# Altium PCB TECLADO-G5-5A.pcbDoc.PcbDoc (part 2 of 4)
Units mil, origin at the board's own origin, x right, y up, seen from the top; angles counter-clockwise.
Board outline 3514 x 3456 mil, 2 copper layers (Top Layer, Bottom Layer); 59 components, 33 nets, 154 pads, 25 vias.
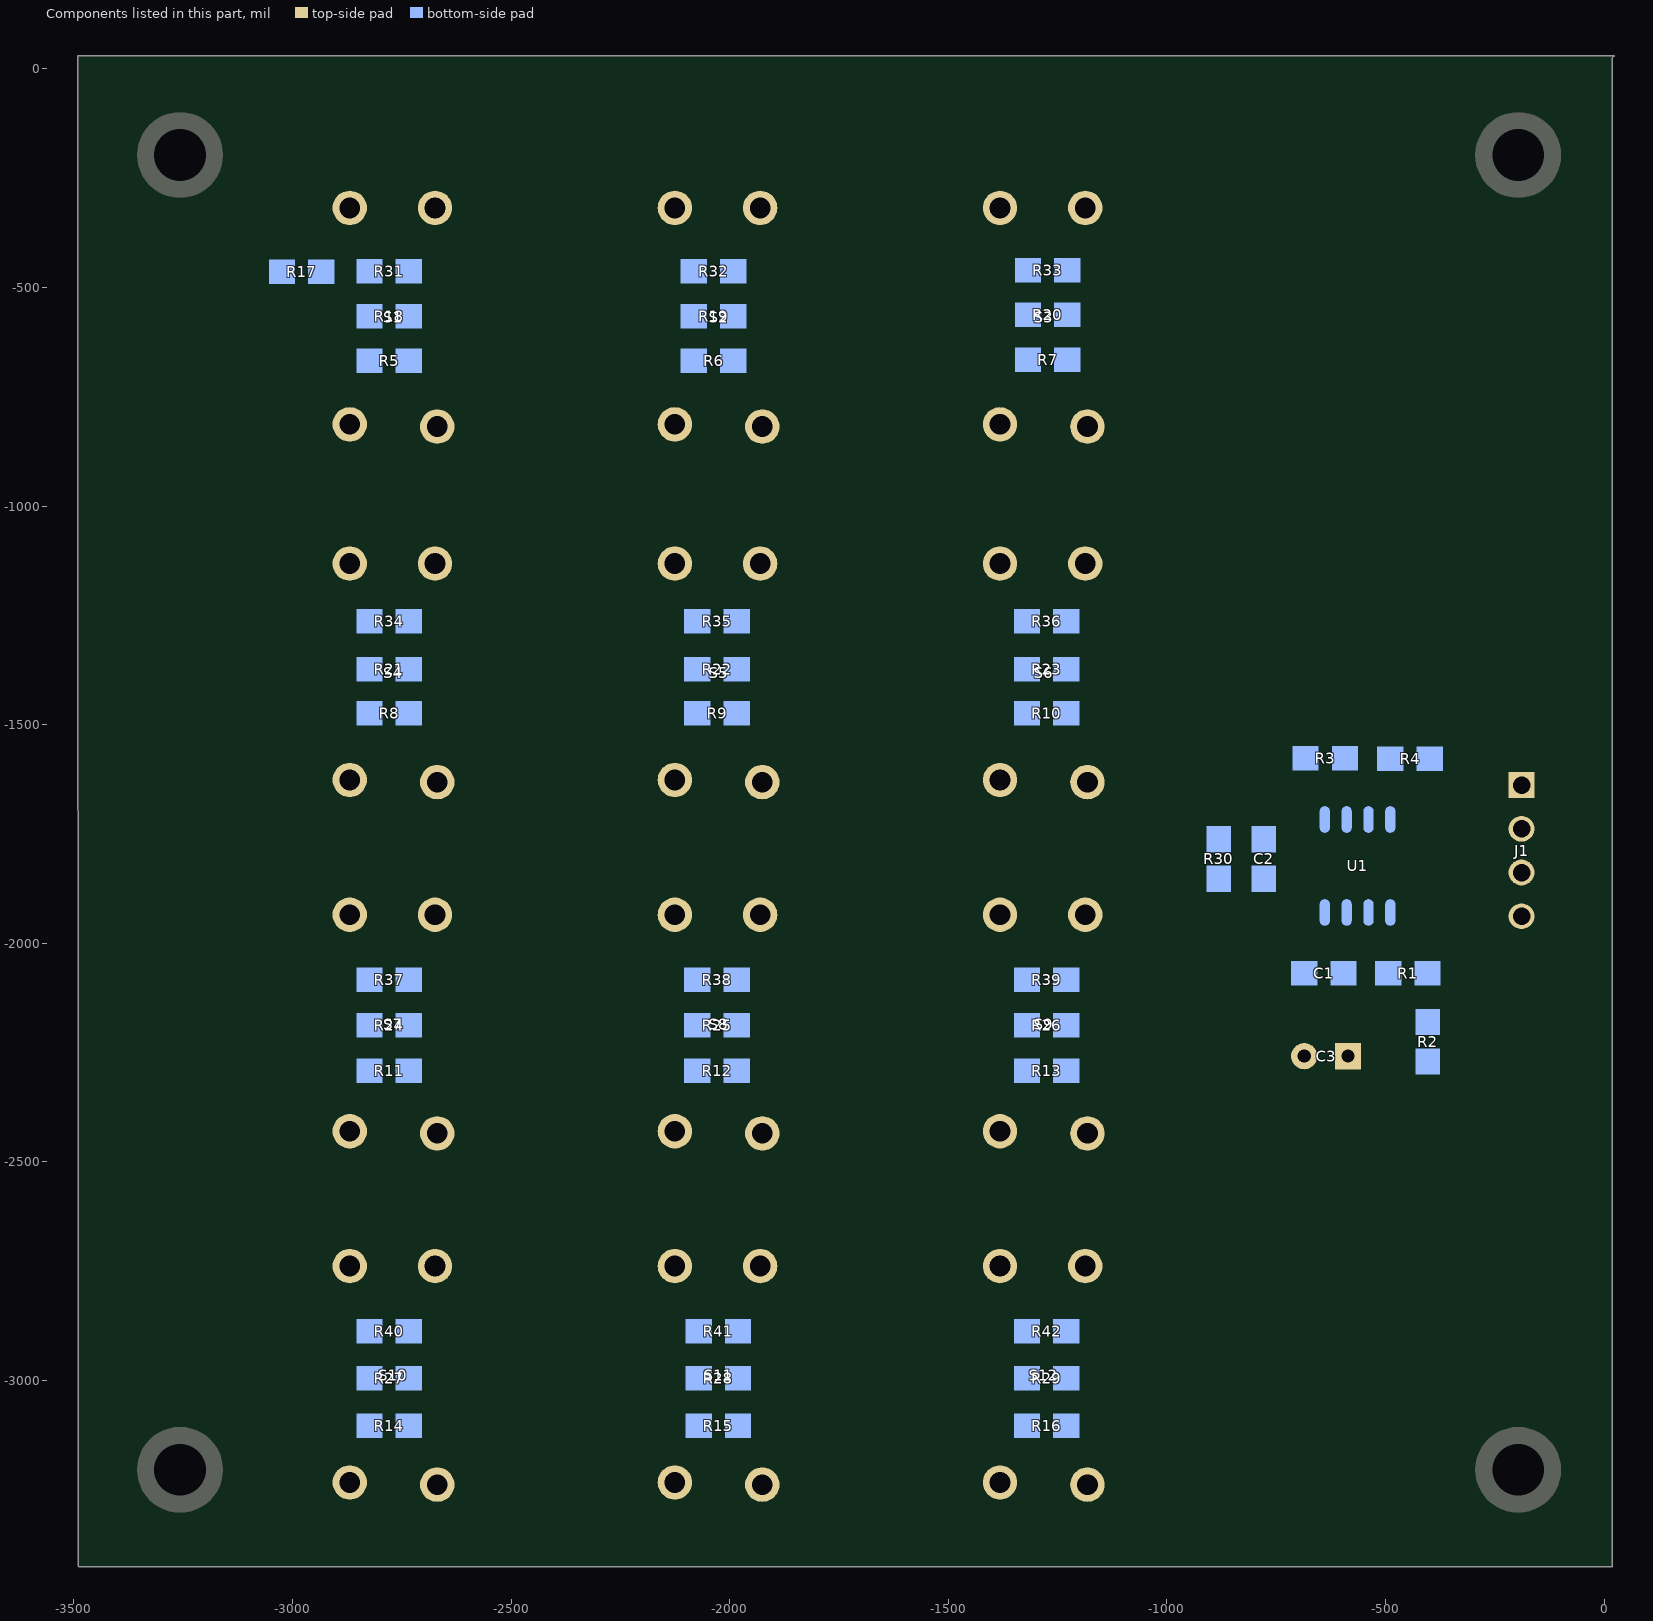
[diagram p2: the components of this part, seen from the top]

## Via types
v1: diameter 66.93, hole 39.37, Top Layer to Bottom Layer, 25 vias

## Nets (pads, with @x,y where several pads share a name; then routed paths per layer and width w, separated by ;. In a path a pad name is that pad's centre, name@x,y a point inside that pad or via, vN(x,y) a via of type N, cw(c..) or ccw(c..) an arc to the next point about the centre after c; other vN are vias at no path point) (continued)
copper on no net: (continued)
  Top Layer w1: -741,-1281 -735,-1281 ; -741,-1280 -735,-1280 ; -741,-1279 -735,-1279 ; -741,-1278 -735,-1278 ; -741,-1277 -735,-1277 ; -741,-1276 -735,-1276 ; -741,-1275 -735,-1275 ; -741,-1274 -735,-1274 ; -741,-1273 -735,-1273 ; -741,-1272 -735,-1272 ; -741,-1271 -735,-1271 ; -741,-1270 -735,-1270 ; -741,-1269 -735,-1269 ; -741,-1268 -735,-1268 ; -741,-1267 -735,-1267 ; -741,-1266 -735,-1266 ; -741,-1265 -735,-1265 ; -741,-1264 -735,-1264 ; -741,-1263 -735,-1263 ; -741,-1262 -734,-1262 ; -741,-1261 -734,-1261 ; -741,-1260 -734,-1260 ; -740,-1291 -734,-1291 ; -740,-1290 -734,-1290 ; -740,-1289 -735,-1289 ; -740,-1288 -735,-1288 ; -740,-1287 -735,-1287 ; -740,-1286 -735,-1286 ; -740,-1285 -735,-1285 ; -740,-1284 -735,-1284 ; -740,-1283 -735,-1283 ; -740,-1282 -735,-1282 ; -740,-1259 -734,-1259 ; -740,-1258 -734,-1258 ; -740,-1257 -734,-1257 ; -740,-1256 -734,-1256 ; -740,-1255 -734,-1255 ; -740,-1254 -734,-1254 ; -740,-1253 -734,-1253 ; -740,-1252 -734,-1252 ; -740,-1251 -734,-1251 ; -740,-1250 -734,-1250 ; -740,-1249 -733,-1249 ; -740,-1248 -733,-1248 ; -739,-1293 -733,-1293 ; -739,-1292 -734,-1292 ; -739,-1247 -733,-1247 ; -739,-1246 -733,-1246 ; -738,-1295 -730,-1295 ; -738,-1294 -732,-1294 ; -738,-1245 -733,-1245 ; -738,-1244 -733,-1244 ; -738,-1243 -733,-1243 ; -738,-1242 -733,-1242 ; -738,-1241 -733,-1241 ; -738,-1240 -732,-1240 ; -737,-1296 -728,-1296 ; -737,-1239 -732,-1239 ; -737,-1238 -732,-1238 ; -737,-1237 -731,-1237 ; -737,-1236 -731,-1236 ; -737,-1235 -731,-1235 ; -736,-1297 -725,-1297 ; -736,-1234 -730,-1234 ; -736,-1233 -730,-1233 ; -736,-1232 -730,-1232 ; -735,-1298 -723,-1298 ; -735,-1231 -729,-1231 ; -734,-1230 -728,-1230 ; -734,-1229 -721,-1229 ; -733,-1299 -721,-1299 ; -733,-1228 -721,-1228 ; -733,-1227 -719,-1227 ; -732,-1226 -711,-1226 ; -731,-1300 -718,-1300 ; -730,-1301 -715,-1301 ; -730,-1225 -701,-1225 ; -728,-1224 -697,-1224 ; -727,-1302 -711,-1302 ; -727,-1239 -722,-1239 ; -727,-1238 -722,-1238 ; -727,-1237 -722,-1237 ; -727,-1236 -722,-1236 ; -727,-1235 -722,-1235 ; -727,-1234 -722,-1234 ; -727,-1233 -722,-1233 ; -727,-1232 -722,-1232 ; -726,-1258 -720,-1258 ; -726,-1257 -720,-1257 ; -726,-1256 -720,-1256 ; -726,-1255 -720,-1255 ; -726,-1254 -720,-1254 ; -726,-1253 -720,-1253 ; -726,-1252 -720,-1252 ; -726,-1251 -720,-1251 ; -726,-1250 -720,-1250 ; -726,-1245 -720,-1245 ; -726,-1244 -721,-1244 ; -726,-1243 -722,-1243 ; -726,-1242 -722,-1242 ; -726,-1241 -722,-1241 ; -726,-1240 -722,-1240 ; -726,-1231 -722,-1231 ; -726,-1230 -722,-1230 ; -726,-1223 -685,-1223 ; -725,-1303 -708,-1303 ; -725,-1264 -719,-1264 ; -725,-1263 -719,-1263 ; -725,-1262 -720,-1262 ; -725,-1261 -720,-1261 ; -725,-1260 -720,-1260 ; -725,-1259 -720,-1259 ; -725,-1249 -682,-1249 ; -725,-1248 -672,-1248 ; -725,-1247 -668,-1247 ; -725,-1246 -661,-1246 ; -724,-1266 -719,-1266 ; -724,-1265 -719,-1265 ; -723,-1304 -706,-1304 ; -723,-1270 -717,-1270 ; -723,-1269 -718,-1269 ; -723,-1268 -718,-1268 ; -723,-1267 -718,-1267 ; -723,-1222 -674,-1222 ; -722,-1273 -715,-1273 ; -722,-1272 -716,-1272 ; -722,-1271 -716,-1271 ; -721,-1305 -702,-1305 ; -720,-1276 -713,-1276 ; -720,-1275 -714,-1275 ; -720,-1274 -715,-1274 ; -719,-1277 -713,-1277 ; -718,-1306 -698,-1306 ; -718,-1279 -711,-1279 ; -718,-1278 -712,-1278 ; -718,-1221 -663,-1221 ; -717,-1280 -710,-1280 ; -716,-1281 -709,-1281 ; -715,-1307 -694,-1307 ; -715,-1282 -708,-1282 ; -715,-1220 -714,-1220 ; -714,-1283 -700,-1283 ; -713,-1284 -674,-1284 ; -712,-1308 -690,-1308 ; -712,-1285 -555,-1285 ; -712,-1220 -659,-1220 ; -710,-1309 -688,-1309 ; -710,-1286 -561,-1286 ; -709,-1219 -653,-1219 ; -707,-1287 -574,-1287 ; -706,-1310 -682,-1310 ; -703,-1311 -676,-1311 ; -703,-1245 -654,-1245 ; -702,-532 -697,-532 ; -702,-531 -697,-531 ; -702,-530 -698,-530 ; -702,-529 -698,-529 ; -702,-528 -698,-528 ; -702,-527 -698,-527 ; -702,-526 -698,-526 ; -702,-525 -698,-525 ; -702,-524 -698,-524 ; -702,-523 -698,-523 ; -702,-522 -698,-522 ; -702,-521 -698,-521 ; -702,-520 -698,-520 ; -702,-519 -698,-519 ; -702,-518 -698,-518 ; -702,-517 -698,-517 ; -702,-516 -697,-516 ; -701,-1218 -647,-1218 ; -701,-534 -694,-534 ; -701,-533 -695,-533 ; -701,-515 -697,-515 ; -701,-514 -697,-514 ; -701,-513 -697,-513 ; -701,-512 -697,-512 ; -701,-511 -697,-511 ; -701,-510 -697,-510 ; -700,-535 -694,-535 ; -700,-509 -696,-509 ; -700,-508 -695,-508 ; -700,-507 -695,-507 ; -699,-1288 -590,-1288 ; -699,-536 -693,-536 ; -699,-506 -693,-506 ; -698,-1312 -668,-1312 ; -698,-537 -692,-537 ; -698,-505 -692,-505 ; -697,-538 -691,-538 ; -697,-504 -691,-504 ; -696,-1313 -657,-1313 ; -696,-539 -690,-539 ; -696,-503 -690,-503 ; -695,-540 -689,-540 ; -695,-502 -689,-502 ; -694,-542 -687,-542 ; -694,-541 -688,-541 ; -694,-501 -689,-501 ; -693,-543 -686,-543 ; -693,-500 -688,-500 ; -693,-499 -688,-499 ; -693,-498 -688,-498 ; -693,-497 -688,-497 ; -692,-1314 -658,-1314 ; -692,-544 -685,-544 ; -692,-496 -688,-496 ; -692,-495 -687,-495 ; -691,-1217 -641,-1217 ; -691,-545 -684,-545 ; -691,-494 -687,-494 ; -691,-493 -687,-493 ; -691,-492 -687,-492 ; -691,-491 -686,-491 ; -691,-490 -685,-490 ; -690,-1244 -649,-1244 ; -690,-579 -686,-579 ; -690,-578 -686,-578 ; -690,-577 -686,-577 ; -690,-576 -687,-576 ; -690,-575 -687,-575 ; -690,-574 -686,-574 ; -690,-573 -685,-573 ; -690,-572 -684,-572 ; -690,-546 -683,-546 ; -690,-489 -684,-489 ; -690,-488 -682,-488 ; -689,-581 -662,-581 ; -689,-580 -684,-580 ; -689,-571 -674,-571 ; -689,-558 -684,-558 ; -689,-487 -680,-487 ; -688,-582 -678,-582 ; -688,-570 -674,-570 ; -688,-569 -674,-569 ; -688,-568 -684,-568 ; -688,-567 -684,-567 ; -688,-566 -684,-566 ; -688,-565 -683,-565 ; -688,-564 -683,-564 ; -688,-562 -677,-562 ; -688,-561 -676,-561 ; -688,-560 -676,-560 ; -688,-559 -669,-559 ; -688,-557 -684,-557 ; -688,-556 -684,-556 ; -688,-547 -682,-547 ; -687,-1315 -659,-1315 ; -687,-1289 -609,-1289 ; -687,-583 -677,-583 ; -687,-563 -677,-563 ; -687,-555 -683,-555 ; -687,-548 -681,-548 ; -687,-486 -678,-486 ; -686,-554 -682,-554 ; -686,-549 -643,-549 ; -686,-485 -676,-485 ; -685,-1243 -646,-1243 ; -685,-553 -681,-553 ; -685,-550 -652,-550 ; -684,-552 -679,-552 ; -684,-551 -648,-551 ; -684,-484 -675,-484 ; -683,-584 -674,-584 ; -683,-483 -674,-483 ; -682,-1290 -616,-1290 ; -682,-574 -677,-574 ; -682,-572 -673,-572 ; -682,-568 -673,-568 ; -682,-564 -677,-564 ; -682,-558 -668,-558 ; -681,-1316 -659,-1316 ; -681,-580 -669,-580 ; -681,-576 -677,-576 ; -681,-575 -677,-575 ; -681,-573 -677,-573 ; -681,-567 -677,-567 ; -681,-566 -677,-566 ; -681,-565 -677,-565 ; -681,-557 -666,-557 ; -680,-585 -669,-585 ; -680,-579 -670,-579 ; -680,-578 -671,-578 ; -680,-577 -672,-577 ; -680,-556 -664,-556 ; -680,-482 -673,-482 ; -679,-555 -668,-555 ; -679,-481 -672,-481 ; -678,-1216 -625,-1216 ; -678,-586 -667,-586 ; -678,-554 -668,-554 ; -678,-480 -672,-480 ; -677,-1242 -642,-1242 ; -677,-582 -661,-582 ; -677,-553 -674,-553 ; -677,-552 -665,-552 ; -677,-479 -671,-479 ; -676,-587 -666,-587 ; -676,-583 -656,-583 ; -676,-576 -672,-576 ; -676,-575 -673,-575 ; -676,-574 -673,-574 ; -676,-573 -673,-573 ; -676,-567 -673,-567 ; -676,-566 -673,-566 ; -676,-565 -673,-565 ; -676,-564 -673,-564 ; -676,-478 -670,-478 ; -676,-477 -670,-477 ; -675,-1317 -660,-1317 ; -675,-1215 -626,-1215 ; -675,-588 -662,-588 ; -675,-563 -672,-563 ; -675,-562 -672,-562 ; -675,-476 -670,-476 ; -675,-475 -670,-475 ; -674,-561 -671,-561 ; -674,-474 -669,-474 ; -673,-590 -669,-590 ; -673,-589 -634,-589 ; -673,-584 -670,-584 ; -673,-560 -670,-560 ; -673,-553 -667,-553 ; -673,-473 -669,-473 ; -673,-472 -668,-472 ; -673,-471 -666,-471 ; -672,-592 -667,-592 ; -672,-591 -669,-591 ; -672,-571 -665,-571 ; -672,-570 -659,-570 ; -672,-470 -664,-470 ; -671,-1318 -661,-1318 ; -671,-593 -666,-593 ; -671,-574 -668,-574 ; -671,-573 -668,-573 ; -671,-572 -667,-572 ; -671,-569 -657,-569 ; -671,-568 -667,-568 ; -671,-469 -647,-469 ; -670,-594 -666,-594 ; -670,-577 -666,-577 ; -670,-576 -666,-576 ; -670,-575 -668,-575 ; -670,-567 -668,-567 ; -670,-566 -668,-566 ; -670,-565 -667,-565 ; -670,-548 -645,-548 ; -670,-468 -649,-468 ; -669,-596 -654,-596 ; -669,-595 -665,-595 ; -669,-579 -665,-579 ; -669,-578 -666,-578 ; -669,-564 -666,-564 ; -669,-563 -666,-563 ; -669,-562 -664,-562 ; -669,-547 -648,-547 ; -668,-597 -654,-597 ; -668,-590 -650,-590 ; -668,-584 -647,-584 ; -668,-580 -664,-580 ; -668,-561 -663,-561 ; -668,-546 -661,-546 ; -667,-1241 -636,-1241 ; -667,-598 -661,-598 ; -667,-555 -650,-555 ; -667,-467 -650,-467 ; -666,-609 -661,-609 ; -666,-608 -662,-608 ; -666,-607 -662,-607 ; -666,-606 -662,-606 ; -666,-605 -662,-605 ; -666,-604 -662,-604 ; -666,-603 -662,-603 ; -666,-602 -662,-602 ; -666,-599 -661,-599 ; -666,-591 -643,-591 ; -666,-585 -630,-585 ; -666,-560 -662,-560 ; -666,-545 -660,-545 ; -665,-611 -659,-611 ; -665,-610 -660,-610 ; -665,-601 -662,-601 ; -665,-600 -662,-600 ; -665,-592 -645,-592 ; -665,-568 -657,-568 ; -665,-559 -661,-559 ; -665,-554 -652,-554 ; -664,-1214 -628,-1214 ; -664,-612 -651,-612 ; -664,-595 -656,-595 ; -664,-558 -653,-558 ; -664,-544 -658,-544 ; -663,-1312 -657,-1312 ; -663,-1311 -656,-1311 ; -663,-594 -659,-594 ; -663,-567 -656,-567 ; -663,-553 -654,-553 ; -663,-543 -656,-543 ; -662,-1310 -655,-1310 ; -662,-1309 -654,-1309 ; -662,-586 -654,-586 ; -662,-557 -643,-557 ; -662,-542 -642,-542 ; -661,-1308 -653,-1308 ; -661,-613 -650,-613 ; -661,-593 -648,-593 ; -661,-541 -642,-541 ; -661,-540 -641,-540 ; -661,-466 -653,-466 ; -660,-1307 -649,-1307 ; -660,-614 -649,-614 ; -660,-587 -657,-587 ; -660,-582 -656,-582 ; -660,-556 -648,-556 ; -660,-539 -641,-539 ; -659,-1306 -638,-1306 ; -659,-1305 -639,-1305 ; -659,-1240 -632,-1240 ; -659,-581 -656,-581 ; -659,-580 -655,-580 ; -659,-579 -655,-579 ; -659,-566 -656,-566 ; -659,-565 -655,-565 ; -659,-564 -655,-564 ; -659,-563 -655,-563 ; -659,-562 -655,-562 ; -659,-561 -655,-561 ; -659,-538 -655,-538 ; -659,-537 -654,-537 ; -658,-1220 -656,-1220 ; -658,-610 -653,-610 ; -658,-609 -654,-609 ; -658,-608 -655,-608 ; -658,-607 -655,-607 ; -658,-606 -654,-606 ; -658,-605 -654,-605 ; -658,-604 -654,-604 ; -658,-603 -653,-603 ; -658,-602 -629,-602 ; -658,-578 -655,-578 ; -658,-577 -655,-577 ; -658,-576 -655,-576 ; -658,-575 -654,-575 ; -658,-560 -655,-560 ; -658,-559 -654,-559 ; -658,-536 -654,-536 ; -658,-535 -653,-535 ; -657,-1304 -640,-1304 ; -657,-615 -648,-615 ; -657,-611 -652,-611 ; -657,-601 -628,-601 ; -657,-600 -627,-600 ; -657,-599 -654,-599 ; -657,-598 -654,-598 ; -657,-574 -640,-574 ; -657,-573 -640,-573 ; -657,-534 -652,-534 ; -657,-533 -650,-533 ; -656,-1303 -642,-1303 ; -656,-572 -640,-572 ; -655,-1213 -630,-1213 ; -655,-532 -648,-532 ; -654,-588 -633,-588 ; -654,-571 -640,-571 ; -653,-1302 -644,-1302 ; -653,-1239 -621,-1239 ; -653,-552 -638,-552 ; -653,-531 -645,-531 ; -653,-470 -647,-470 ; -652,-583 -647,-583 ; -652,-471 -646,-471 ; -651,-616 -647,-616 ; -651,-587 -632,-587 ; -651,-586 -631,-586 ; -651,-550 -642,-550 ; -651,-530 -644,-530 ; -651,-473 -644,-473 ; -651,-472 -645,-472 ; -650,-1173 -645,-1173 ; -650,-1172 -645,-1172 ; -650,-1171 -645,-1171 ; -650,-617 -642,-617 ; -650,-582 -639,-582 ; -650,-558 -634,-558 ; -650,-474 -643,-474 ; -649,-1238 -622,-1238 ; -649,-1175 -644,-1175 ; -649,-1174 -644,-1174 ; -649,-1170 -644,-1170 ; -649,-618 -640,-618 ; -649,-590 -642,-590 ; -649,-581 -638,-581 ; -649,-553 -642,-553 ; -649,-475 -643,-475 ; -648,-1307 -637,-1307 ; -648,-1179 -642,-1179 ; -648,-1178 -643,-1178 ; -648,-1177 -643,-1177 ; -648,-1176 -644,-1176 ; -648,-1169 -644,-1169 ; -648,-1168 -643,-1168 ; -648,-619 -640,-619 ; -648,-599 -639,-599 ; -648,-598 -643,-598 ; -648,-580 -643,-580 ; -648,-559 -633,-559 ; -648,-554 -642,-554 ; -648,-529 -641,-529 ; -648,-477 -641,-477 ; -648,-476 -642,-476 ; -647,-1212 -631,-1212 ; -647,-1181 -641,-1181 ; -647,-1180 -641,-1180 ; -647,-1167 -643,-1167 ; -647,-1166 -642,-1166 ; -647,-1165 -641,-1165 ; -647,-612 -643,-612 ; -647,-611 -643,-611 ; -647,-610 -643,-610 ; -647,-609 -643,-609 ; -647,-608 -643,-608 ; -647,-607 -643,-607 ; -647,-606 -644,-606 ; -647,-605 -644,-605 ; -647,-604 -644,-604 ; -647,-603 -644,-603 ; -647,-597 -642,-597 ; -647,-579 -643,-579 ; -647,-560 -633,-560 ; -647,-556 -644,-556 ; -647,-555 -641,-555 ; -647,-478 -641,-478 ; -646,-1183 -640,-1183 ; -646,-1182 -640,-1182 ; -646,-1164 -641,-1164 ; -646,-620 -639,-620 ; -646,-614 -638,-614 ; -646,-613 -637,-613 ; -646,-596 -641,-596 ; -646,-578 -642,-578 ; -646,-551 -640,-551 ; -646,-545 -642,-545 ; -646,-544 -643,-544 ; -646,-543 -643,-543 ; -646,-528 -634,-528 ; -646,-480 -639,-480 ; -646,-479 -640,-479 ; -645,-1308 -637,-1308 ; -645,-1185 -639,-1185 ; -645,-1184 -640,-1184 ; -645,-1163 -641,-1163 ; -645,-1162 -640,-1162 ; -645,-1161 -640,-1161 ; -645,-1160 -640,-1160 ; -645,-621 -618,-621 ; -645,-616 -642,-616 ; -645,-615 -641,-615 ; -645,-595 -641,-595 ; -645,-584 -636,-584 ; -645,-577 -641,-577 ; -645,-563 -641,-563 ; -645,-562 -642,-562 ; -645,-561 -643,-561 ; -645,-547 -637,-547 ; -645,-546 -618,-546 ; -645,-481 -639,-481 ; -644,-1309 -636,-1309 ; -644,-1237 -622,-1237 ; -644,-1187 -638,-1187 ; -644,-1186 -638,-1186 ; -644,-1159 -639,-1159 ; -644,-1158 -639,-1158 ; -644,-1157 -638,-1157 ; -644,-622 -627,-622 ; -644,-594 -640,-594 ; -644,-583 -640,-583 ; -644,-576 -641,-576 ; -644,-575 -641,-575 ; -644,-565 -640,-565 ; -644,-564 -641,-564 ; -644,-538 -640,-538 ; -644,-537 -640,-537 ; -644,-527 -636,-527 ; -644,-483 -637,-483 ; -644,-482 -638,-482 ; -643,-1310 -636,-1310 ; -643,-1189 -636,-1189 ; -643,-1188 -637,-1188 ; -643,-1156 -638,-1156 ; -643,-1155 -637,-1155 ; -643,-1154 -637,-1154 ; -643,-1153 -637,-1153 ; -643,-623 -639,-623 ; -643,-593 -638,-593 ; -643,-592 -637,-592 ; -643,-570 -640,-570 ; -643,-569 -640,-569 ; -643,-568 -640,-568 ; -643,-567 -640,-567 ; -643,-566 -640,-566 ; -643,-556 -635,-556 ; -643,-548 -638,-548 ; -643,-536 -639,-536 ; -643,-535 -638,-535 ; -643,-534 -638,-534 ; -643,-485 -636,-485 ; -643,-484 -637,-484 ; -642,-1311 -636,-1311 ; -642,-1211 -633,-1211 ; -642,-1190 -636,-1190 ; -642,-1152 -637,-1152 ; -642,-591 -636,-591 ; -642,-557 -634,-557 ; -642,-533 -636,-533 ; -642,-526 -637,-526 ; -642,-486 -636,-486 ; -641,-1313 -634,-1313 ; -641,-1312 -636,-1312 ; -641,-1210 -633,-1210 ; -641,-1209 -633,-1209 ; -641,-1192 -634,-1192 ; -641,-1191 -635,-1191 ; -641,-1151 -636,-1151 ; -641,-1150 -636,-1150 ; -641,-1149 -636,-1149 ; -641,-1148 -636,-1148 ; -641,-1147 -635,-1147 ; -641,-612 -633,-612 ; -641,-590 -636,-590 ; -641,-580 -638,-580 ; -641,-532 -632,-532 ; -641,-487 -635,-487 ; -640,-1316 -593,-1316 ; -640,-1315 -593,-1315 ; -640,-1314 -592,-1314 ; -640,-1208 -632,-1208 ; -640,-1207 -631,-1207 ; -640,-1194 -633,-1194 ; -640,-1193 -634,-1193 ; -640,-1146 -635,-1146 ; -640,-1145 -634,-1145 ; -640,-1144 -634,-1144 ; -640,-1143 -634,-1143 ; -640,-579 -637,-579 ; -640,-578 -637,-578 ; -640,-553 -637,-553 ; -640,-545 -619,-545 ; -640,-525 -639,-525 ; -640,-488 -634,-488 ; -639,-1317 -593,-1317 ; -639,-1206 -631,-1206 ; -639,-1195 -632,-1195 ; -639,-1142 -634,-1142 ; -639,-1141 -633,-1141 ; -639,-1140 -633,-1140 ; -639,-1139 -633,-1139 ; -639,-583 -635,-583 ; -639,-577 -631,-577 ; -639,-555 -636,-555 ; -639,-554 -636,-554 ; -639,-544 -620,-544 ; -639,-531 -623,-531 ; -639,-530 -624,-530 ; -639,-529 -625,-529 ; -639,-489 -633,-489 ; -638,-1318 -594,-1318 ; -638,-1236 -618,-1236 ; -638,-1205 -630,-1205 ; -638,-1196 -631,-1196 ; -638,-1138 -633,-1138 ; -638,-1137 -633,-1137 ; -638,-1136 -632,-1136 ; -638,-1135 -632,-1135 ; -638,-576 -636,-576 ; -638,-575 -636,-575 ; -638,-574 -636,-574 ; -638,-573 -636,-573 ; -638,-572 -636,-572 ; -638,-571 -636,-571 ; -638,-569 -636,-569 ; -638,-568 -636,-568 ; -638,-543 -634,-543 ; -638,-491 -622,-491 ; -638,-490 -623,-490 ; -637,-1204 -629,-1204 ; -637,-1203 -596,-1203 ; -637,-1197 -630,-1197 ; -637,-1134 -632,-1134 ; -637,-1133 -632,-1133 ; -637,-1132 -632,-1132 ; -637,-1131 -631,-1131 ; -637,-1130 -631,-1130 ; -637,-1129 -631,-1129 ; -637,-1128 -630,-1128 ; -637,-611 -627,-611 ; -637,-603 -630,-603 ; -637,-582 -634,-582 ; -637,-581 -633,-581 ; -637,-580 -633,-580 ; -637,-570 -636,-570 ; -637,-567 -636,-567 ; -637,-542 -634,-542 ; -637,-541 -632,-541 ; -637,-492 -620,-492 ; -636,-1284 -547,-1284 ; -636,-1202 -606,-1202 ; -636,-1201 -609,-1201 ; -636,-1200 -618,-1200 ; -636,-1199 -624,-1199 ; -636,-1198 -629,-1198 ; -636,-1127 -630,-1127 ; -636,-1126 -630,-1126 ; -636,-1125 -630,-1125 ; -636,-1124 -630,-1124 ; -636,-1123 -629,-1123 ; -636,-1122 -629,-1122 ; -636,-1121 -629,-1121 ; -636,-1120 -629,-1120 ; -636,-1119 -629,-1119 ; -636,-620 -618,-620 ; -636,-579 -633,-579 ; -636,-578 -632,-578 ; -636,-562 -632,-562 ; -636,-561 -632,-561 ; -636,-552 -632,-552 ; -636,-551 -633,-551 ; -636,-550 -633,-550 ; -636,-549 -633,-549 ; -636,-548 -629,-548 ; -636,-540 -631,-540 ; -636,-539 -622,-539 ; -636,-538 -622,-538 ; -636,-493 -631,-493 ; -635,-1217 -623,-1217 ; -635,-1118 -629,-1118 ; -635,-604 -630,-604 ; -635,-576 -632,-576 ; -635,-563 -632,-563 ; -635,-553 -631,-553 ; -635,-547 -618,-547 ; -635,-537 -633,-537 ; -635,-494 -631,-494 ; -634,-1117 -629,-1117 ; -634,-1116 -629,-1116 ; -634,-1115 -628,-1115 ; -634,-1114 -628,-1114 ; -634,-1113 -628,-1113 ; -634,-1112 -627,-1112 ; -634,-1111 -627,-1111 ; -634,-1110 -627,-1110 ; -634,-1109 -627,-1109 ; -634,-1108 -627,-1108 ; -634,-610 -629,-610 ; -634,-607 -629,-607 ; -634,-606 -629,-606 ; -634,-605 -630,-605 ; -634,-584 -629,-584 ; -634,-575 -631,-575 ; -634,-574 -631,-574 ; -634,-573 -630,-573 ; -634,-572 -630,-572 ; -634,-571 -630,-571 ; -634,-570 -630,-570 ; -634,-569 -630,-569 ; -634,-568 -625,-568 ; -634,-567 -626,-567 ; -634,-566 -630,-566 ; -634,-565 -631,-565 ; -634,-564 -631,-564 ; -634,-555 -630,-555 ; -634,-554 -631,-554 ; -634,-495 -630,-495 ; -633,-1235 -615,-1235 ; -633,-1218 -621,-1218 ; -633,-1107 -627,-1107 ; -633,-1106 -627,-1106 ; -633,-1105 -627,-1105 ; -633,-1104 -627,-1104 ; -633,-1103 -627,-1103 ; -633,-1102 -627,-1102 ; -633,-1101 -627,-1101 ; -633,-1100 -626,-1100 ; -633,-1099 -626,-1099 ; -633,-1098 -626,-1098 ; -633,-1097 -626,-1097 ; -633,-1096 -626,-1096 ; -633,-609 -629,-609 ; -633,-608 -629,-608 ; -633,-599 -626,-599 ; -633,-583 -623,-583 ; -633,-556 -628,-556 ; -633,-543 -621,-543 ; -633,-496 -629,-496 ; -632,-1219 -618,-1219 ; -632,-1095 -626,-1095 ; -632,-1094 -626,-1094 ; -632,-1093 -626,-1093 ; -632,-1092 -626,-1092 ; -632,-1091 -626,-1091 ; -632,-1090 -626,-1090 ; -632,-1089 -626,-1089 ; -632,-1088 -626,-1088 ; -632,-1087 -626,-1087 ; -632,-1086 -625,-1086 ; -632,-1085 -625,-1085 ; -632,-1084 -625,-1084 ; -632,-1083 -625,-1083 ; -632,-1082 -625,-1082 ; -632,-612 -626,-612 ; -632,-598 -625,-598 ; -632,-582 -613,-582 ; -632,-557 -599,-557 ; -632,-549 -628,-549 ; -632,-489 -626,-489 ; -631,-1220 -617,-1220 ; -631,-1081 -625,-1081 ; -631,-1080 -625,-1080 ; -631,-1079 -625,-1079 ; -631,-1078 -625,-1078 ; -631,-1077 -625,-1077 ; -631,-1076 -625,-1076 ; -631,-1075 -625,-1075 ; -631,-613 -625,-613 ; -631,-581 -611,-581 ; -631,-558 -597,-558 ; -631,-550 -628,-550 ; -631,-542 -622,-542 ; -631,-528 -625,-528 ; -631,-497 -629,-497 ; -630,-1234 -608,-1234 ; -630,-1074 -625,-1074 ; -630,-1073 -625,-1073 ; -630,-1072 -625,-1072 ; -630,-1071 -625,-1071 ; -630,-1070 -625,-1070 ; -630,-1069 -625,-1069 ; -630,-1068 -625,-1068 ; -630,-1067 -625,-1067 ; -630,-1066 -624,-1066 ; -630,-1065 -624,-1065 ; -630,-1064 -624,-1064 ; -630,-1063 -624,-1063 ; -630,-1062 -624,-1062 ; -630,-1061 -624,-1061 ; -630,-1060 -623,-1060 ; -630,-1059 -623,-1059 ; -630,-1058 -623,-1058 ; -630,-1057 -623,-1057 ; -630,-1056 -623,-1056 ; -630,-1055 -623,-1055 ; -630,-1054 -623,-1054 ; -630,-1053 -623,-1053 ; -630,-1052 -623,-1052 ; -630,-1051 -623,-1051 ; -630,-1050 -623,-1050 ; -630,-1049 -623,-1049 ; -630,-1048 -623,-1048 ; -630,-1047 -623,-1047 ; -630,-1046 -623,-1046 ; -630,-1045 -623,-1045 ; -630,-614 -624,-614 ; -630,-597 -624,-597 ; -630,-559 -615,-559 ; -630,-552 -625,-552 ; -630,-551 -627,-551 ; -630,-537 -622,-537 ; -630,-527 -624,-527 ; -629,-1221 -615,-1221 ; -629,-1044 -623,-1044 ; -629,-1043 -623,-1043 ; -629,-1042 -623,-1042 ; -629,-1041 -623,-1041 ; -629,-1040 -623,-1040 ; -629,-1039 -623,-1039 ; -629,-1038 -623,-1038 ; -629,-1037 -623,-1037 ; -629,-1036 -623,-1036 ; -629,-1035 -623,-1035 ; -629,-1034 -623,-1034 ; -629,-1033 -623,-1033 ; -629,-1032 -623,-1032 ; -629,-1031 -623,-1031 ; -629,-1030 -623,-1030 ; -629,-1029 -623,-1029 ; -629,-1028 -623,-1028 ; -629,-1027 -623,-1027 ; -629,-1026 -623,-1026 ; -629,-1025 -623,-1025 ; -629,-1024 -623,-1024 ; -629,-1023 -623,-1023 ; -629,-1022 -623,-1022 ; -629,-1021 -623,-1021 ; -629,-1020 -623,-1020 ; -629,-1019 -623,-1019 ; -629,-1018 -623,-1018 ; -629,-1017 -623,-1017 ; -629,-1016 -623,-1016 ; -629,-1015 -623,-1015 ; -629,-1014 -623,-1014 ; -629,-1013 -623,-1013 ; -629,-1012 -623,-1012 ; -629,-1011 -623,-1011 ; -629,-1010 -623,-1010 ; -629,-1009 -623,-1009 ; -629,-1008 -623,-1008 ; -629,-1007 -623,-1007 ; -629,-1006 -623,-1006 ; -629,-1005 -623,-1005 ; -629,-1004 -623,-1004 ; -629,-1003 -623,-1003 ; -629,-1002 -623,-1002 ; -629,-1001 -623,-1001 ; -629,-1000 -623,-1000 ; -629,-999 -623,-999 ; -629,-998 -623,-998 ; -629,-997 -623,-997 ; -629,-996 -623,-996 ; -629,-995 -623,-995 ; -629,-994 -623,-994 ; -629,-993 -623,-993 ; -629,-992 -623,-992 ; -629,-991 -623,-991 ; -629,-990 -624,-990 ; -629,-989 -624,-989 ; -629,-988 -624,-988 ; -629,-987 -624,-987 ; -629,-986 -624,-986 ; -629,-985 -624,-985 ; -629,-984 -624,-984 ; -629,-983 -624,-983 ; -629,-982 -624,-982 ; -629,-981 -624,-981 ; -629,-980 -624,-980 ; -629,-979 -625,-979 ; -629,-978 -625,-978 ; -629,-977 -625,-977 ; -629,-976 -625,-976 ; -629,-975 -625,-975 ; -629,-974 -625,-974 ; -629,-973 -625,-973 ; -629,-972 -625,-972 ; -629,-971 -625,-971 ; -629,-970 -625,-970 ; -629,-969 -625,-969 ; -629,-968 -625,-968 ; -629,-967 -623,-967 ; -629,-966 -623,-966 ; -629,-619 -620,-619 ; -629,-615 -624,-615 ; -629,-596 -623,-596 ; -629,-580 -606,-580 ; -629,-571 -619,-571 ; -629,-570 -615,-570 ; -629,-569 -610,-569 ; -629,-566 -626,-566 ; -629,-565 -622,-565 ; -629,-564 -618,-564 ; -629,-563 -617,-563 ; -629,-553 -611,-553 ; -629,-541 -622,-541 ; -629,-540 -622,-540 ; -629,-526 -623,-526 ; -628,-965 -623,-965 ; -628,-616 -623,-616 ; -628,-595 -622,-595 ; -628,-584 -623,-584 ; -628,-579 -622,-579 ; -628,-562 -613,-562 ; -628,-554 -618,-554 ; -628,-525 -623,-525 ; -627,-1241 -620,-1241 ; -627,-1240 -620,-1240 ; -627,-1233 -608,-1233 ; -627,-1222 -613,-1222 ; -627,-964 -622,-964 ; -627,-963 -622,-963 ; -627,-962 -622,-962 ; -627,-961 -621,-961 ; -627,-618 -620,-618 ; -627,-617 -621,-617 ; -627,-594 -622,-594 ; -627,-572 -621,-572 ; -627,-560 -618,-560 ; -627,-532 -622,-532 ; -627,-524 -622,-524 ; -626,-1242 -619,-1242 ; -626,-1204 -585,-1204 ; -626,-960 -620,-960 ; -626,-959 -620,-959 ; -626,-593 -620,-593 ; -626,-585 -622,-585 ; -626,-578 -622,-578 ; -626,-577 -622,-577 ; -626,-576 -622,-576 ; -626,-575 -622,-575 ; -626,-574 -622,-574 ; -626,-573 -622,-573 ; -626,-555 -619,-555 ; -626,-533 -622,-533 ; -626,-523 -622,-523 ; -626,-522 -621,-522 ; -626,-521 -620,-521 ; -625,-1243 -618,-1243 ; -625,-1223 -610,-1223 ; -625,-958 -619,-958 ; -625,-957 -619,-957 ; -625,-956 -619,-956 ; -625,-592 -619,-592 ; -625,-587 -620,-587 ; -625,-586 -621,-586 ; -625,-561 -610,-561 ; -625,-556 -620,-556 ; -625,-536 -622,-536 ; -625,-535 -622,-535 ; -625,-534 -622,-534 ; -625,-520 -620,-520 ; -625,-519 -619,-519 ; -625,-493 -620,-493 ; -624,-1244 -618,-1244 ; -624,-955 -618,-955 ; -624,-591 -611,-591 ; -624,-588 -595,-588 ; -624,-548 -616,-548 ; -624,-518 -619,-518 ; -624,-494 -619,-494 ; -623,-1246 -616,-1246 ; -623,-1245 -617,-1245 ; -623,-1232 -589,-1232 ; -623,-1224 -608,-1224 ; -623,-954 -618,-954 ; -623,-953 -617,-953 ; -623,-590 -609,-590 ; -623,-589 -590,-589 ; -623,-517 -618,-517 ; -623,-516 -618,-516 ; -623,-495 -618,-495 ; -623,-446 -615,-446 ; -623,-445 -613,-445 ; -623,-444 -612,-444 ; -623,-443 -619,-443 ; -623,-442 -619,-442 ; -623,-441 -618,-441 ; -623,-440 -618,-440 ; -622,-1248 -615,-1248 ; -622,-1247 -615,-1247 ; -622,-952 -616,-952 ; -622,-951 -616,-951 ; -622,-950 -615,-950 ; -622,-622 -616,-622 ; -622,-552 -612,-552 ; -622,-551 -613,-551 ; -622,-550 -614,-550 ; -622,-549 -615,-549 ; -622,-515 -618,-515 ; -622,-514 -617,-514 ; -622,-497 -616,-497 ; -622,-496 -617,-496 ; -622,-450 -619,-450 ; -622,-449 -618,-449 ; -622,-448 -617,-448 ; -622,-447 -616,-447 ; -622,-439 -618,-439 ; -622,-438 -618,-438 ; -622,-437 -618,-437 ; -622,-436 -618,-436 ; -622,-435 -618,-435 ; -622,-434 -618,-434 ; -622,-433 -617,-433 ; -622,-432 -617,-432 ; -622,-431 -616,-431 ; -621,-1249 -614,-1249 ; -621,-1225 -606,-1225 ; -621,-1205 -571,-1205 ; -621,-949 -615,-949 ; -621,-623 -615,-623 ; -621,-513 -616,-513 ; -621,-498 -616,-498 ; -621,-430 -616,-430 ; -621,-429 -616,-429 ; -621,-428 -616,-428 ; -620,-1250 -613,-1250 ; -620,-1226 -604,-1226 ; -620,-948 -614,-948 ; -620,-947 -614,-947 ; -620,-946 -613,-946 ; -620,-624 -614,-624 ; -620,-512 -616,-512 ; -620,-511 -615,-511 ; -620,-510 -615,-510 ; -620,-499 -615,-499 ; -620,-427 -615,-427 ; -620,-426 -615,-426 ; -620,-425 -615,-425 ; -620,-424 -615,-424 ; -619,-1252 -612,-1252 ; -619,-1251 -613,-1251 ; -619,-1231 -592,-1231 ; -619,-945 -613,-945 ; -619,-944 -612,-944 ; -619,-625 -613,-625 ; -619,-568 -595,-568 ; -619,-509 -615,-509 ; -619,-508 -615,-508 ; -619,-507 -614,-507 ; -619,-501 -614,-501 ; -619,-500 -615,-500 ; -619,-423 -615,-423 ; -619,-422 -614,-422 ; -619,-421 -614,-421 ; -619,-420 -613,-420 ; -618,-1254 -611,-1254 ; -618,-1253 -611,-1253 ; -618,-943 -611,-943 ; -618,-942 -611,-942 ; -618,-626 -612,-626 ; -618,-567 -595,-567 ; -618,-506 -613,-506 ; -618,-505 -613,-505 ; -618,-504 -614,-504 ; -618,-503 -614,-503 ; -618,-502 -613,-502 ; -618,-419 -613,-419 ; -618,-418 -612,-418 ; -618,-417 -612,-417 ; -618,-416 -612,-416 ; -617,-1255 -611,-1255 ; -617,-1227 -601,-1227 ; -617,-941 -611,-941 ; -617,-627 -610,-627 ; -617,-560 -605,-560 ; -617,-556 -609,-556 ; -617,-554 -610,-554 ; -617,-443 -611,-443 ; -617,-415 -611,-415 ; -616,-1257 -609,-1257 ; -616,-1256 -610,-1256 ; -616,-1230 -594,-1230 ; -616,-940 -610,-940 ; -616,-939 -609,-939 ; -616,-628 -609,-628 ; -616,-555 -609,-555 ; -616,-442 -610,-442 ; -616,-441 -609,-441 ; -616,-414 -611,-414 ; -616,-413 -611,-413 ; -616,-412 -611,-412 ; -615,-1259 -608,-1259 ; -615,-1258 -609,-1258 ; -615,-1229 -596,-1229 ; -615,-1228 -599,-1228 ; -615,-1206 -535,-1206 ; -615,-938 -609,-938 ; -615,-937 -608,-937 ; -615,-629 -608,-629 ; -615,-440 -608,-440 ; -615,-411 -610,-411 ; -615,-410 -609,-410 ; -615,-409 -609,-409 ; -614,-1260 -608,-1260 ; -614,-1235 -607,-1235 ; -614,-936 -608,-936 ; -614,-935 -607,-935 ; -614,-579 -600,-579 ; -614,-559 -597,-559 ; -614,-439 -607,-439 ; -614,-408 -608,-408 ; -613,-1262 -607,-1262 ; -613,-1261 -607,-1261 ; -613,-1236 -606,-1236 ; -613,-934 -607,-934 ; -613,-933 -606,-933 ; -613,-631 -605,-631 ; -613,-630 -606,-630 ; -613,-587 -597,-587 ; -613,-438 -606,-438 ; -613,-407 -608,-407 ; -613,-406 -608,-406 ; -613,-405 -607,-405 ; -613,-358 -565,-358 ; -613,-357 -561,-357 ; -612,-1264 -605,-1264 ; -612,-1263 -606,-1263 ; -612,-1237 -605,-1237 ; -612,-1207 -539,-1207 ; -612,-932 -605,-932 ; -612,-931 -605,-931 ; -612,-566 -601,-566 ; -612,-437 -606,-437 ; -612,-436 -604,-436 ; -612,-404 -607,-404 ; -612,-403 -606,-403 ; -612,-360 -572,-360 ; -612,-359 -571,-359 ; -611,-1266 -605,-1266 ; -611,-1265 -605,-1265 ; -611,-1238 -604,-1238 ; -611,-930 -604,-930 ; -611,-633 -603,-633 ; -611,-632 -604,-632 ; -611,-586 -598,-586 ; -611,-435 -604,-435 ; -611,-402 -605,-402 ; -611,-401 -605,-401 ; -611,-400 -605,-400 ; -611,-362 -605,-362 ; -611,-361 -606,-361 ; -610,-1267 -604,-1267 ; -610,-1240 -603,-1240 ; -610,-1239 -604,-1239 ; -610,-929 -604,-929 ; -610,-928 -603,-928 ; -610,-581 -606,-581 ; -610,-434 -597,-434 ; -610,-399 -604,-399 ; -610,-363 -603,-363 ; -609,-1269 -603,-1269 ; -609,-1268 -604,-1268 ; -609,-1241 -602,-1241 ; -609,-927 -602,-927 ; -609,-926 -602,-926 ; -609,-634 -602,-634 ; -609,-583 -605,-583 ; -609,-582 -605,-582 ; -609,-433 -597,-433 ; -609,-398 -604,-398 ; -609,-397 -603,-397 ; -609,-364 -602,-364 ; -608,-1271 -602,-1271 ; -608,-1270 -602,-1270 ; -608,-1242 -601,-1242 ; -608,-925 -601,-925 ; -608,-924 -601,-924 ; -608,-635 -601,-635 ; -608,-584 -604,-584 ; -608,-578 -590,-578 ; -608,-432 -597,-432 ; -608,-396 -602,-396 ; -608,-395 -602,-395 ; -608,-394 -601,-394 ; -608,-365 -600,-365 ; -607,-1273 -601,-1273 ; -607,-1272 -602,-1272 ; -607,-1244 -601,-1244 ; -607,-1243 -601,-1243 ; -607,-923 -600,-923 ; -607,-636 -599,-636 ; -607,-585 -603,-585 ; -607,-577 -590,-577 ; -607,-565 -602,-565 ; -607,-431 -597,-431 ; -607,-393 -600,-393 ; -606,-1283 -538,-1283 ; -606,-1275 -601,-1275 ; -606,-1274 -601,-1274 ; -606,-1245 -600,-1245 ; -606,-922 -600,-922 ; -606,-921 -599,-921 ; -606,-637 -598,-637 ; -606,-392 -600,-392 ; -606,-391 -599,-391 ; -606,-366 -597,-366 ; -605,-1277 -600,-1277 ; -605,-1276 -600,-1276 ; -605,-1247 -599,-1247 ; -605,-1246 -599,-1246 ; -605,-920 -598,-920 ; -605,-919 -598,-919 ; -605,-638 -597,-638 ; -605,-430 -597,-430 ; -605,-390 -598,-390 ; -605,-367 -594,-367 ; -604,-1280 -598,-1280 ; -604,-1279 -599,-1279 ; -604,-1278 -599,-1278 ; -604,-1249 -597,-1249 ; -604,-1248 -598,-1248 ; -604,-918 -597,-918 ; -604,-917 -597,-917 ; -604,-639 -595,-639 ; -604,-569 -596,-569 ; -604,-429 -597,-429 ; -604,-389 -598,-389 ; -604,-388 -597,-388 ; -604,-368 -586,-368 ; -603,-1282 -598,-1282 ; -603,-1281 -598,-1281 ; -603,-1250 -597,-1250 ; -603,-1233 -585,-1233 ; -603,-916 -596,-916 ; -603,-435 -597,-435 ; -603,-428 -597,-428 ; -603,-387 -597,-387 ; -602,-1252 -596,-1252 ; -602,-1251 -597,-1251 ; -602,-1234 -583,-1234 ; -602,-982 -596,-982 ; -602,-981 -597,-981 ; -602,-980 -597,-980 ; -602,-979 -598,-979 ; -602,-978 -598,-978 ; -602,-977 -598,-977 ; -602,-976 -598,-976 ; -602,-975 -598,-975 ; -602,-974 -598,-974 ; -602,-973 -598,-973 ; -602,-972 -597,-972 ; -602,-971 -597,-971 ; -602,-970 -597,-970 ; -602,-969 -597,-969 ; -602,-968 -597,-968 ; -602,-967 -597,-967 ; -602,-966 -597,-966 ; -602,-915 -595,-915 ; -602,-914 -595,-914 ; -602,-640 -594,-640 ; -602,-576 -590,-576 ; -602,-570 -596,-570 ; -602,-560 -596,-560 ; -602,-450 -597,-450 ; -602,-449 -597,-449 ; -602,-448 -597,-448 ; -602,-447 -597,-447 ; -602,-446 -597,-446 ; -602,-445 -597,-445 ; -602,-444 -597,-444 ; -602,-443 -597,-443 ; -602,-442 -597,-442 ; -602,-441 -597,-441 ; -602,-440 -597,-440 ; -602,-439 -597,-439 ; -602,-438 -597,-438 ; -602,-437 -597,-437 ; -602,-436 -597,-436 ; -602,-427 -597,-427 ; -602,-386 -596,-386 ; -602,-385 -595,-385 ; -602,-369 -580,-369 ; -602,-361 -583,-361 ; -601,-1254 -594,-1254 ; -601,-1253 -595,-1253 ; -601,-1208 -544,-1208 ; -601,-983 -594,-983 ; -601,-965 -597,-965 ; -601,-964 -596,-964 ; -601,-963 -596,-963 ; -601,-962 -596,-962 ; -601,-961 -595,-961 ; -601,-913 -594,-913 ; -601,-912 -593,-912 ; -601,-641 -593,-641 ; -601,-571 -595,-571 ; -601,-456 -595,-456 ; -601,-455 -595,-455 ; -601,-454 -596,-454 ; -601,-453 -596,-453 ; -601,-452 -596,-452 ; -601,-451 -597,-451 ; -601,-426 -597,-426 ; -601,-384 -594,-384 ; -601,-370 -580,-370 ; -600,-1255 -594,-1255 ; -600,-984 -592,-984 ; -600,-960 -595,-960 ; -600,-959 -595,-959 ; -600,-958 -595,-958 ; -600,-957 -594,-957 ; -600,-956 -594,-956 ; -600,-955 -594,-955 ; -600,-911 -593,-911 ; -600,-910 -592,-910 ; -600,-642 -592,-642 ; -600,-590 -590,-590 ; -600,-572 -594,-572 ; -600,-562 -595,-562 ; -600,-561 -595,-561 ; -600,-460 -594,-460 ; -600,-459 -595,-459 ; -600,-458 -595,-458 ; -600,-457 -596,-457 ; -600,-383 -594,-383 ; -600,-382 -593,-382 ; -599,-1313 -592,-1313 ; -599,-1257 -593,-1257 ; -599,-1256 -593,-1256 ; -599,-1235 -581,-1235 ; -599,-985 -590,-985 ; -599,-954 -594,-954 ; -599,-909 -591,-909 ; -599,-643 -590,-643 ; -599,-591 -590,-591 ; -599,-573 -593,-573 ; -599,-566 -595,-566 ; -599,-563 -595,-563 ; -599,-461 -594,-461 ; -599,-425 -597,-425 ; -599,-381 -592,-381 ; -598,-1259 -592,-1259 ; -598,-1258 -592,-1258 ; -598,-953 -594,-953 ; -598,-952 -593,-952 ; -598,-951 -593,-951 ; -598,-950 -593,-950 ; -598,-908 -591,-908 ; -598,-644 -589,-644 ; -598,-592 -590,-592 ; -598,-574 -592,-574 ; -598,-565 -594,-565 ; -598,-564 -594,-564 ; -598,-464 -594,-464 ; -598,-463 -594,-463 ; -598,-462 -594,-462 ; -598,-424 -597,-424 ; -598,-380 -592,-380 ; -597,-1312 -591,-1312 ; -597,-1311 -591,-1311 ; -597,-1310 -590,-1310 ; -597,-1260 -591,-1260 ; -597,-986 -588,-986 ; -597,-949 -593,-949 ; -597,-948 -592,-948 ; -597,-947 -591,-947 ; -597,-946 -591,-946 ; -597,-945 -591,-945 ; -597,-907 -590,-907 ; -597,-906 -590,-906 ; -597,-905 -589,-905 ; -597,-593 -588,-593 ; -597,-575 -591,-575 ; -597,-467 -588,-467 ; -597,-466 -588,-466 ; -597,-465 -589,-465 ; -597,-379 -591,-379 ; -597,-371 -583,-371 ; -596,-1309 -589,-1309 ; -596,-1262 -590,-1262 ; -596,-1261 -591,-1261 ; -596,-1236 -578,-1236 ; -596,-987 -585,-987 ; -596,-944 -591,-944 ; -596,-904 -588,-904 ; -596,-645 -587,-645 ; -596,-594 -587,-594 ; -596,-469 -589,-469 ; -596,-468 -589,-468 ; -596,-378 -590,-378 ; -595,-1308 -588,-1308 ; -595,-1307 -587,-1307 ; -595,-1264 -589,-1264 ; -595,-1263 -590,-1263 ; -595,-943 -590,-943 ; -595,-942 -590,-942 ; -595,-941 -590,-941 ; -595,-903 -588,-903 ; -595,-646 -586,-646 ; -595,-579 -590,-579 ; -595,-471 -589,-471 ; -595,-470 -589,-470 ; -595,-377 -590,-377 ; -595,-376 -588,-376 ; -594,-1306 -583,-1306 ; -594,-1266 -588,-1266 ; -594,-1265 -589,-1265 ; -594,-988 -581,-988 ; -594,-940 -589,-940 ; -594,-939 -589,-939 ; -594,-938 -589,-938 ; -594,-937 -589,-937 ; -594,-902 -587,-902 ; -594,-901 -587,-901 ; -594,-647 -585,-647 ; -594,-588 -590,-588 ; -594,-587 -590,-587 ; -594,-586 -590,-586 ; -594,-585 -590,-585 ; -594,-584 -590,-584 ; -594,-583 -590,-583 ; -594,-582 -590,-582 ; -594,-581 -590,-581 ; -594,-580 -590,-580 ; -594,-472 -589,-472 ; -594,-375 -587,-375 ; -593,-1305 -573,-1305 ; -593,-1268 -587,-1268 ; -593,-1267 -588,-1267 ; -593,-1237 -574,-1237 ; -593,-936 -588,-936 ; -593,-935 -587,-935 ; -593,-934 -587,-934 ; -593,-900 -586,-900 ; -593,-899 -586,-899 ; -593,-648 -583,-648 ; -593,-595 -585,-595 ; -593,-474 -589,-474 ; -593,-473 -589,-473 ; -593,-464 -589,-464 ; -593,-463 -581,-463 ; -593,-462 -583,-462 ; -593,-461 -583,-461 ; -593,-374 -586,-374 ; -592,-1304 -574,-1304 ; -592,-1270 -586,-1270 ; -592,-1269 -587,-1269 ; -592,-989 -580,-989 ; -592,-933 -587,-933 ; -592,-596 -584,-596 ; -592,-475 -590,-475 ; -592,-460 -584,-460 ; -592,-373 -586,-373 ; -592,-372 -585,-372 ; -591,-1303 -575,-1303 ; -591,-1272 -585,-1272 ; -591,-1271 -586,-1271 ; -591,-932 -587,-932 ; -591,-931 -586,-931 ; -591,-930 -586,-930 ; -591,-898 -584,-898 ; -591,-897 -584,-897 ; -591,-896 -584,-896 ; -591,-649 -581,-649 ; -591,-597 -581,-597 ; -591,-459 -584,-459 ; -591,-458 -586,-458 ; -591,-457 -586,-457 ; -591,-456 -587,-456 ; -591,-455 -587,-455 ; -590,-1274 -584,-1274 ; -590,-1273 -585,-1273 ; -590,-1238 -570,-1238 ; -590,-990 -577,-990 ; -590,-929 -586,-929 ; -590,-928 -585,-928 ; -590,-927 -584,-927 ; -590,-926 -584,-926 ; -590,-895 -583,-895 ; -590,-894 -582,-894 ; -590,-650 -580,-650 ; -590,-454 -587,-454 ; -590,-453 -586,-453 ; -589,-1302 -577,-1302 ; -589,-1277 -583,-1277 ; -589,-1276 -584,-1276 ; -589,-1275 -584,-1275 ; -589,-1239 -568,-1239 ; -589,-925 -584,-925 ; -589,-924 -583,-924 ; -589,-893 -582,-893 ; -589,-598 -579,-598 ; -589,-452 -586,-452 ; -589,-451 -586,-451 ; -588,-1279 -583,-1279 ; -588,-1278 -583,-1278 ; -588,-991 -573,-991 ; -588,-923 -583,-923 ; -588,-922 -583,-922 ; -588,-892 -581,-892 ; -588,-891 -580,-891 ; -588,-651 -578,-651 ; -588,-450 -586,-450 ; -587,-1282 -528,-1282 ; -587,-1281 -581,-1281 ; -587,-1280 -582,-1280 ; -587,-1209 -551,-1209 ; -587,-921 -582,-921 ; -587,-920 -582,-920 ; -587,-919 -582,-919 ; -587,-890 -580,-890 ; -587,-652 -577,-652 ; -587,-599 -577,-599 ; -587,-465 -579,-465 ; -587,-464 -580,-464 ; -587,-449 -585,-449 ; -586,-1240 -564,-1240 ; -586,-918 -581,-918 ; -586,-917 -580,-917 ; -586,-916 -580,-916 ; -586,-889 -579,-889 ; -586,-888 -578,-888 ; -586,-653 -575,-653 ; -586,-466 -579,-466 ; -585,-1301 -581,-1301 ; -585,-1241 -560,-1241 ; -585,-992 -569,-992 ; -585,-915 -580,-915 ; -585,-887 -578,-887 ; -585,-600 -574,-600 ; -585,-467 -578,-467 ; -584,-1243 -578,-1243 ; -584,-1242 -555,-1242 ; -584,-914 -579,-914 ; -584,-913 -579,-913 ; -584,-912 -579,-912 ; -584,-886 -577,-886 ; -584,-885 -576,-885 ; -584,-654 -573,-654 ; -584,-601 -573,-601 ; -584,-468 -577,-468 ; -583,-1245 -577,-1245 ; -583,-1244 -577,-1244 ; -583,-911 -578,-911 ; -583,-910 -577,-910 ; -583,-909 -577,-909 ; -583,-884 -576,-884 ; -583,-469 -576,-469 ; -583,-356 -556,-356 ; -582,-1247 -576,-1247 ; -582,-1246 -576,-1246 ; -582,-993 -565,-993 ; -582,-908 -576,-908 ; -582,-907 -576,-907 ; -582,-883 -575,-883 ; -582,-882 -574,-882 ; -582,-655 -572,-655 ; -582,-602 -570,-602 ; -582,-470 -575,-470 ; -581,-1306 -572,-1306 ; -581,-1248 -575,-1248 ; -581,-994 -564,-994 ; -581,-906 -576,-906 ; -581,-905 -575,-905 ; -581,-881 -573,-881 ; -581,-656 -570,-656 ; -581,-471 -574,-471 ; -581,-355 -580,-355 ; -580,-1250 -574,-1250 ; -580,-1249 -574,-1249 ; -580,-904 -575,-904 ; -580,-903 -575,-903 ; -580,-880 -573,-880 ; -580,-879 -572,-879 ; -580,-657 -569,-657 ; -580,-472 -572,-472 ; -580,-426 -576,-426 ; -580,-425 -577,-425 ; -580,-424 -578,-424 ; -580,-423 -579,-423 ; -579,-1307 -572,-1307 ; -579,-1252 -573,-1252 ; -579,-1251 -573,-1251 ; -579,-902 -574,-902 ; -579,-901 -573,-901 ; -579,-900 -573,-900 ; -579,-878 -572,-878 ; -579,-877 -572,-877 ; -579,-603 -567,-603 ; -579,-473 -572,-473 ; -579,-449 -573,-449 ; -579,-448 -573,-448 ; -579,-447 -573,-447 ; -579,-446 -573,-446 ; -579,-445 -573,-445 ; -579,-444 -573,-444 ; -579,-443 -573,-443 ; -579,-442 -573,-442 ; -579,-441 -573,-441 ; -579,-440 -573,-440 ; -579,-439 -573,-439 ; -579,-438 -573,-438 ; -579,-437 -573,-437 ; -579,-436 -573,-436 ; -579,-427 -574,-427 ; -579,-355 -554,-355 ; -578,-1308 -572,-1308 ; -578,-1254 -572,-1254 ; -578,-1253 -572,-1253 ; -578,-899 -572,-899 ; -578,-876 -570,-876 ; -578,-875 -570,-875 ; -578,-658 -567,-658 ; -578,-474 -570,-474 ; -578,-450 -573,-450 ; -578,-435 -573,-435 ; -578,-434 -573,-434 ; -578,-428 -573,-428 ; -577,-1309 -571,-1309 ; -577,-1256 -571,-1256 ; -577,-1255 -571,-1255 ; -577,-995 -558,-995 ; -577,-898 -572,-898 ; -577,-897 -572,-897 ; -577,-604 -564,-604 ; -577,-475 -569,-475 ; -577,-456 -563,-456 ; -577,-455 -557,-455 ; -577,-454 -572,-454 ; -577,-453 -572,-453 ; -577,-452 -572,-452 ; -577,-451 -572,-451 ; -577,-433 -564,-433 ; -577,-432 -566,-432 ; -577,-431 -568,-431 ; -577,-430 -570,-430 ; -577,-429 -571,-429 ; -576,-1311 -540,-1311 ; -576,-1310 -534,-1310 ; -576,-1258 -569,-1258 ; -576,-1257 -570,-1257 ; -576,-896 -571,-896 ; -576,-895 -570,-895 ; -576,-894 -570,-894 ; -576,-874 -569,-874 ; -576,-873 -568,-873 ; -576,-872 -568,-872 ; -576,-659 -565,-659 ; -576,-476 -567,-476 ; -576,-460 -570,-460 ; -576,-459 -570,-459 ; -576,-458 -569,-458 ; -576,-457 -564,-457 ; -575,-1314 -556,-1314 ; -575,-1313 -548,-1313 ; -575,-1312 -546,-1312 ; -575,-1260 -569,-1260 ; -575,-1259 -569,-1259 ; -575,-1243 -551,-1243 ; -575,-893 -569,-893 ; -575,-892 -569,-892 ; -575,-871 -567,-871 ; -575,-660 -563,-660 ; -575,-605 -562,-605 ; -575,-477 -557,-477 ; -575,-463 -555,-463 ; -575,-462 -569,-462 ; -575,-461 -569,-461 ; -574,-1315 -568,-1315 ; -574,-1261 -568,-1261 ; -574,-891 -569,-891 ; -574,-870 -566,-870 ; -574,-869 -566,-869 ; -573,-1263 -568,-1263 ; -573,-1262 -568,-1262 ; -573,-1244 -549,-1244 ; -573,-996 -555,-996 ; -573,-890 -568,-890 ; -573,-889 -555,-889 ; -573,-868 -565,-868 ; -573,-661 -562,-661 ; -573,-478 -559,-478 ; -573,-466 -564,-466 ; -573,-465 -563,-465 ; -573,-464 -559,-464 ; -572,-1266 -566,-1266 ; -572,-1265 -567,-1265 ; -572,-1264 -567,-1264 ; -572,-888 -558,-888 ; -572,-887 -561,-887 ; -572,-886 -562,-886 ; -572,-867 -565,-867 ; -572,-866 -564,-866 ; -572,-662 -559,-662 ; -572,-606 -559,-606 ; -572,-479 -559,-479 ; -572,-468 -566,-468 ; -572,-467 -566,-467 ; -572,-434 -563,-434 ; -572,-354 -551,-354 ; -571,-1268 -565,-1268 ; -571,-1267 -566,-1267 ; -571,-885 -565,-885 ; -571,-884 -565,-884 ; -571,-865 -563,-865 ; -571,-470 -565,-470 ; -571,-469 -565,-469 ; -570,-1281 -521,-1281 ; -570,-1270 -565,-1270 ; -570,-1269 -565,-1269 ; -570,-883 -565,-883 ; -570,-864 -562,-864 ; -570,-663 -557,-663 ; -570,-607 -556,-607 ; -570,-480 -558,-480 ; -570,-471 -565,-471 ; -570,-435 -561,-435 ; -569,-1273 -564,-1273 ; -569,-1272 -564,-1272 ; -569,-1271 -564,-1271 ; -569,-1245 -544,-1245 ; -569,-997 -550,-997 ; -569,-882 -564,-882 ; -569,-881 -563,-881 ; -569,-863 -562,-863 ; -569,-862 -561,-862 ; -569,-481 -557,-481 ; -569,-473 -563,-473 ; -569,-472 -563,-472 ; -569,-436 -557,-436 ; -568,-1276 -562,-1276 ; -568,-1275 -563,-1275 ; -568,-1274 -563,-1274 ; -568,-998 -549,-998 ; -568,-880 -563,-880 ; -568,-879 -562,-879 ; -568,-861 -561,-861 ; -568,-664 -554,-664 ; -568,-474 -562,-474 ; -568,-454 -550,-454 ; -567,-1280 -518,-1280 ; -567,-1278 -562,-1278 ; -567,-1277 -562,-1277 ; -567,-878 -562,-878 ; -567,-877 -562,-877 ; -567,-860 -560,-860 ; -567,-859 -559,-859 ; -567,-608 -553,-608 ; -567,-482 -557,-482 ; -567,-475 -562,-475 ; -567,-437 -554,-437 ; -567,-353 -549,-353 ; -566,-1279 -562,-1279 ; -566,-876 -561,-876 ; -566,-858 -558,-858 ; -566,-665 -553,-665 ; -566,-476 -561,-476 ; -566,-462 -550,-462 ; -565,-1247 -533,-1247 ; -565,-1246 -539,-1246 ; -565,-890 -551,-890 ; -565,-875 -560,-875 ; -565,-874 -560,-874 ; -565,-857 -558,-857 ; -565,-483 -555,-483 ; -565,-438 -553,-438 ; -564,-1249 -557,-1249 ; -564,-1248 -531,-1248 ; -564,-999 -544,-999 ; -564,-873 -559,-873 ; -564,-872 -558,-872 ; -564,-856 -557,-856 ; -564,-855 -556,-855 ; -564,-666 -550,-666 ; -564,-609 -551,-609 ; -564,-461 -547,-461 ; -563,-1250 -557,-1250 ; -563,-1210 -561,-1210 ; -563,-994 -558,-994 ; -563,-871 -558,-871 ; -563,-854 -556,-854 ; -563,-484 -555,-484 ; -563,-439 -549,-439 ; -562,-1251 -556,-1251 ; -562,-993 -557,-993 ; -562,-870 -557,-870 ; -562,-869 -557,-869 ; -562,-868 -556,-868 ; -562,-853 -555,-853 ; -562,-852 -554,-852 ; -562,-667 -547,-667 ; -562,-610 -549,-610 ; -561,-1254 -554,-1254 ; -561,-1253 -555,-1253 ; -561,-1252 -555,-1252 ; -561,-992 -557,-992 ; -561,-991 -557,-991 ; -561,-990 -557,-990 ; -561,-989 -557,-989 ; -561,-988 -556,-988 ; -561,-987 -555,-987 ; -561,-891 -548,-891 ; -561,-867 -555,-867 ; -561,-866 -555,-866 ; -561,-851 -554,-851 ; -561,-485 -555,-485 ; -561,-453 -538,-453 ; -561,-440 -545,-440 ; -561,-352 -546,-352 ; -560,-1255 -554,-1255 ; -560,-1000 -534,-1000 ; -560,-986 -555,-986 ; -560,-985 -555,-985 ; -560,-865 -554,-865 ; -560,-850 -553,-850 ; -560,-849 -552,-849 ; -560,-668 -543,-668 ; -560,-476 -557,-476 ; -560,-460 -542,-460 ; -559,-1257 -553,-1257 ; -559,-1256 -553,-1256 ; -559,-984 -555,-984 ; -559,-983 -555,-983 ; -559,-982 -554,-982 ; -559,-981 -554,-981 ; -559,-980 -554,-980 ; -559,-892 -547,-892 ; -559,-864 -554,-864 ; -559,-863 -553,-863 ; -559,-848 -551,-848 ; -559,-611 -547,-611 ; -559,-486 -554,-486 ; -559,-475 -556,-475 ; -559,-441 -539,-441 ; -558,-1259 -551,-1259 ; -558,-1258 -552,-1258 ; -558,-979 -554,-979 ; -558,-978 -554,-978 ; -558,-977 -553,-977 ; -558,-976 -553,-976 ; -558,-975 -553,-975 ; -558,-862 -552,-862 ; -558,-847 -551,-847 ; -558,-488 -553,-488 ; -558,-487 -554,-487 ; -558,-474 -555,-474 ; -558,-473 -554,-473 ; -558,-472 -551,-472 ; -557,-1261 -551,-1261 ; -557,-1260 -551,-1260 ; -557,-1205 -532,-1205 ; -557,-974 -552,-974 ; -557,-973 -552,-973 ; -557,-972 -551,-972 ; -557,-971 -551,-971 ; -557,-970 -551,-970 ; -557,-861 -552,-861 ; -557,-860 -551,-860 ; -557,-846 -550,-846 ; -557,-845 -549,-845 ; -557,-612 -545,-612 ; -557,-490 -551,-490 ; -557,-489 -552,-489 ; -557,-471 -549,-471 ; -557,-351 -544,-351 ; -556,-1309 -529,-1309 ; -556,-1262 -550,-1262 ; -556,-969 -551,-969 ; -556,-893 -547,-893 ; -556,-859 -550,-859 ; -556,-844 -548,-844 ; -556,-669 -530,-669 ; -556,-491 -551,-491 ; -556,-470 -544,-470 ; -556,-442 -519,-442 ; -555,-1279 -512,-1279 ; -555,-1264 -550,-1264 ; -555,-1263 -550,-1263 ; -555,-1249 -524,-1249 ; -555,-1001 -532,-1001 ; -555,-968 -551,-968 ; -555,-967 -550,-967 ; -555,-966 -550,-966 ; -555,-965 -550,-965 ; -555,-964 -550,-964 ; -555,-858 -549,-858 ; -555,-843 -548,-843 ; -555,-842 -547,-842 ; -555,-670 -531,-670 ; -555,-493 -550,-493 ; -555,-492 -550,-492 ; -555,-452 -542,-452 ; -555,-350 -542,-350 ; -554,-1267 -548,-1267 ; -554,-1266 -548,-1266 ; -554,-1265 -549,-1265 ; -554,-963 -550,-963 ; -554,-962 -549,-962 ; -554,-961 -548,-961 ; -554,-960 -548,-960 ; -554,-959 -548,-959 ; -554,-857 -531,-857 ; -554,-856 -536,-856 ; -554,-841 -546,-841 ; -554,-613 -543,-613 ; -554,-495 -548,-495 ; -554,-494 -549,-494 ; -554,-469 -544,-469 ; -554,-459 -529,-459 ; -554,-451 -543,-451 ; -554,-443 -519,-443 ; -553,-1308 -529,-1308 ; -553,-1268 -547,-1268 ; -553,-958 -548,-958 ; -553,-957 -548,-957 ; -553,-956 -547,-956 ; -553,-894 -546,-894 ; -553,-855 -544,-855 ; -553,-840 -546,-840 ; -553,-839 -545,-839 ; -553,-496 -548,-496 ; -553,-412 -548,-412 ; -552,-1270 -547,-1270 ; -552,-1269 -547,-1269 ; -552,-955 -547,-955 ; -552,-954 -547,-954 ; -552,-854 -546,-854 ; -552,-838 -544,-838 ; -552,-671 -533,-671 ; -552,-614 -542,-614 ; -552,-498 -547,-498 ; -552,-497 -547,-497 ; -552,-468 -542,-468 ; -552,-414 -541,-414 ; -552,-413 -545,-413 ; -552,-349 -541,-349 ; -551,-1273 -545,-1273 ; -551,-1272 -546,-1272 ; -551,-1271 -546,-1271 ; -551,-1204 -527,-1204 ; -551,-953 -547,-953 ; -551,-952 -546,-952 ; -551,-951 -546,-951 ; -551,-950 -546,-950 ; -551,-949 -546,-949 ; -551,-897 -546,-897 ; -551,-896 -545,-896 ; -551,-895 -546,-895 ; -551,-837 -544,-837 ; -551,-499 -546,-499 ; -551,-417 -504,-417 ; -551,-416 -533,-416 ; -551,-415 -539,-415 ; -550,-1276 -544,-1276 ; -550,-1275 -544,-1275 ; -550,-1274 -545,-1274 ; -550,-1250 -516,-1250 ; -550,-1002 -526,-1002 ; -550,-948 -545,-948 ; -550,-947 -544,-947 ; -550,-946 -544,-946 ; -550,-945 -544,-945 ; -550,-902 -544,-902 ; -550,-901 -545,-901 ; -550,-900 -545,-900 ; -550,-899 -545,-899 ; -550,-898 -546,-898 ; -550,-836 -543,-836 ; -550,-835 -543,-835 ; -550,-615 -533,-615 ; -550,-501 -544,-501 ; -550,-500 -545,-500 ; -550,-486 -545,-486 ; -550,-485 -548,-485 ; -550,-467 -539,-467 ; -550,-444 -519,-444 ; -550,-420 -545,-420 ; -550,-419 -545,-419 ; -550,-418 -545,-418 ; -549,-1278 -505,-1278 ; -549,-1277 -544,-1277 ; -549,-1003 -525,-1003 ; -549,-944 -544,-944 ; -549,-943 -543,-943 ; -549,-904 -544,-904 ; -549,-903 -544,-903 ; -549,-834 -541,-834 ; -549,-833 -541,-833 ; -549,-503 -544,-503 ; -549,-502 -544,-502 ; -549,-421 -544,-421 ; -548,-942 -543,-942 ; -548,-941 -543,-941 ; -548,-940 -543,-940 ; -548,-907 -543,-907 ; -548,-906 -544,-906 ; -548,-905 -544,-905 ; -548,-858 -525,-858 ; -548,-672 -535,-672 ; -548,-504 -543,-504 ; -548,-487 -533,-487 ; -548,-458 -529,-458 ; -548,-424 -542,-424 ; -548,-423 -543,-423 ; -548,-422 -543,-422 ; -548,-348 -539,-348 ; -547,-939 -542,-939 ; -547,-938 -542,-938 ; -547,-937 -541,-937 ; -547,-936 -541,-936 ; -547,-910 -537,-910 ; -547,-909 -539,-909 ; -547,-908 -543,-908 ; -547,-832 -540,-832 ; -547,-831 -539,-831 ; -547,-616 -535,-616 ; -547,-506 -542,-506 ; -547,-505 -542,-505 ; -547,-476 -543,-476 ; -547,-475 -544,-475 ; -547,-474 -544,-474 ; -547,-473 -544,-473 ; -547,-472 -544,-472 ; -547,-471 -544,-471 ; -547,-466 -537,-466 ; -547,-426 -540,-426 ; -547,-425 -541,-425 ; -547,-334 -542,-334 ; -547,-333 -523,-333 ; -547,-332 -533,-332 ; -547,-331 -535,-331 ; -547,-330 -541,-330 ; -547,-329 -544,-329 ; -546,-1203 -523,-1203 ; -546,-935 -541,-935 ; -546,-934 -541,-934 ; -546,-933 -540,-933 ; -546,-932 -540,-932 ; -546,-830 -538,-830 ; -546,-507 -541,-507 ; -546,-488 -536,-488 ; -546,-477 -543,-477 ; -546,-465 -529,-465 ; -546,-454 -536,-454 ; -546,-427 -540,-427 ; -546,-347 -537,-347 ; -546,-336 -541,-336 ; -546,-335 -542,-335 ; -545,-1251 -506,-1251 ; -545,-931 -540,-931 ; -545,-911 -535,-911 ; -545,-859 -544,-859 ; -545,-829 -538,-829 ; -545,-828 -537,-828 ; -545,-617 -536,-617 ; -545,-509 -540,-509 ; -545,-508 -540,-508 ; -545,-489 -539,-489 ; -545,-478 -540,-478 ; -545,-445 -523,-445 ; -545,-428 -539,-428 ; -545,-337 -540,-337 ; -544,-1307 -528,-1307 ; -544,-1004 -517,-1004 ; -544,-930 -540,-930 ; -544,-929 -539,-929